# Altium PCB Placa1.PcbDoc
Units mm, origin at the board's own origin, x right, y up, seen from the top; angles counter-clockwise.
Board outline 64 x 64 mm, 2 copper layers (Top Layer, Bottom Layer); 5 components, 10 nets, 35 pads, 0 vias.
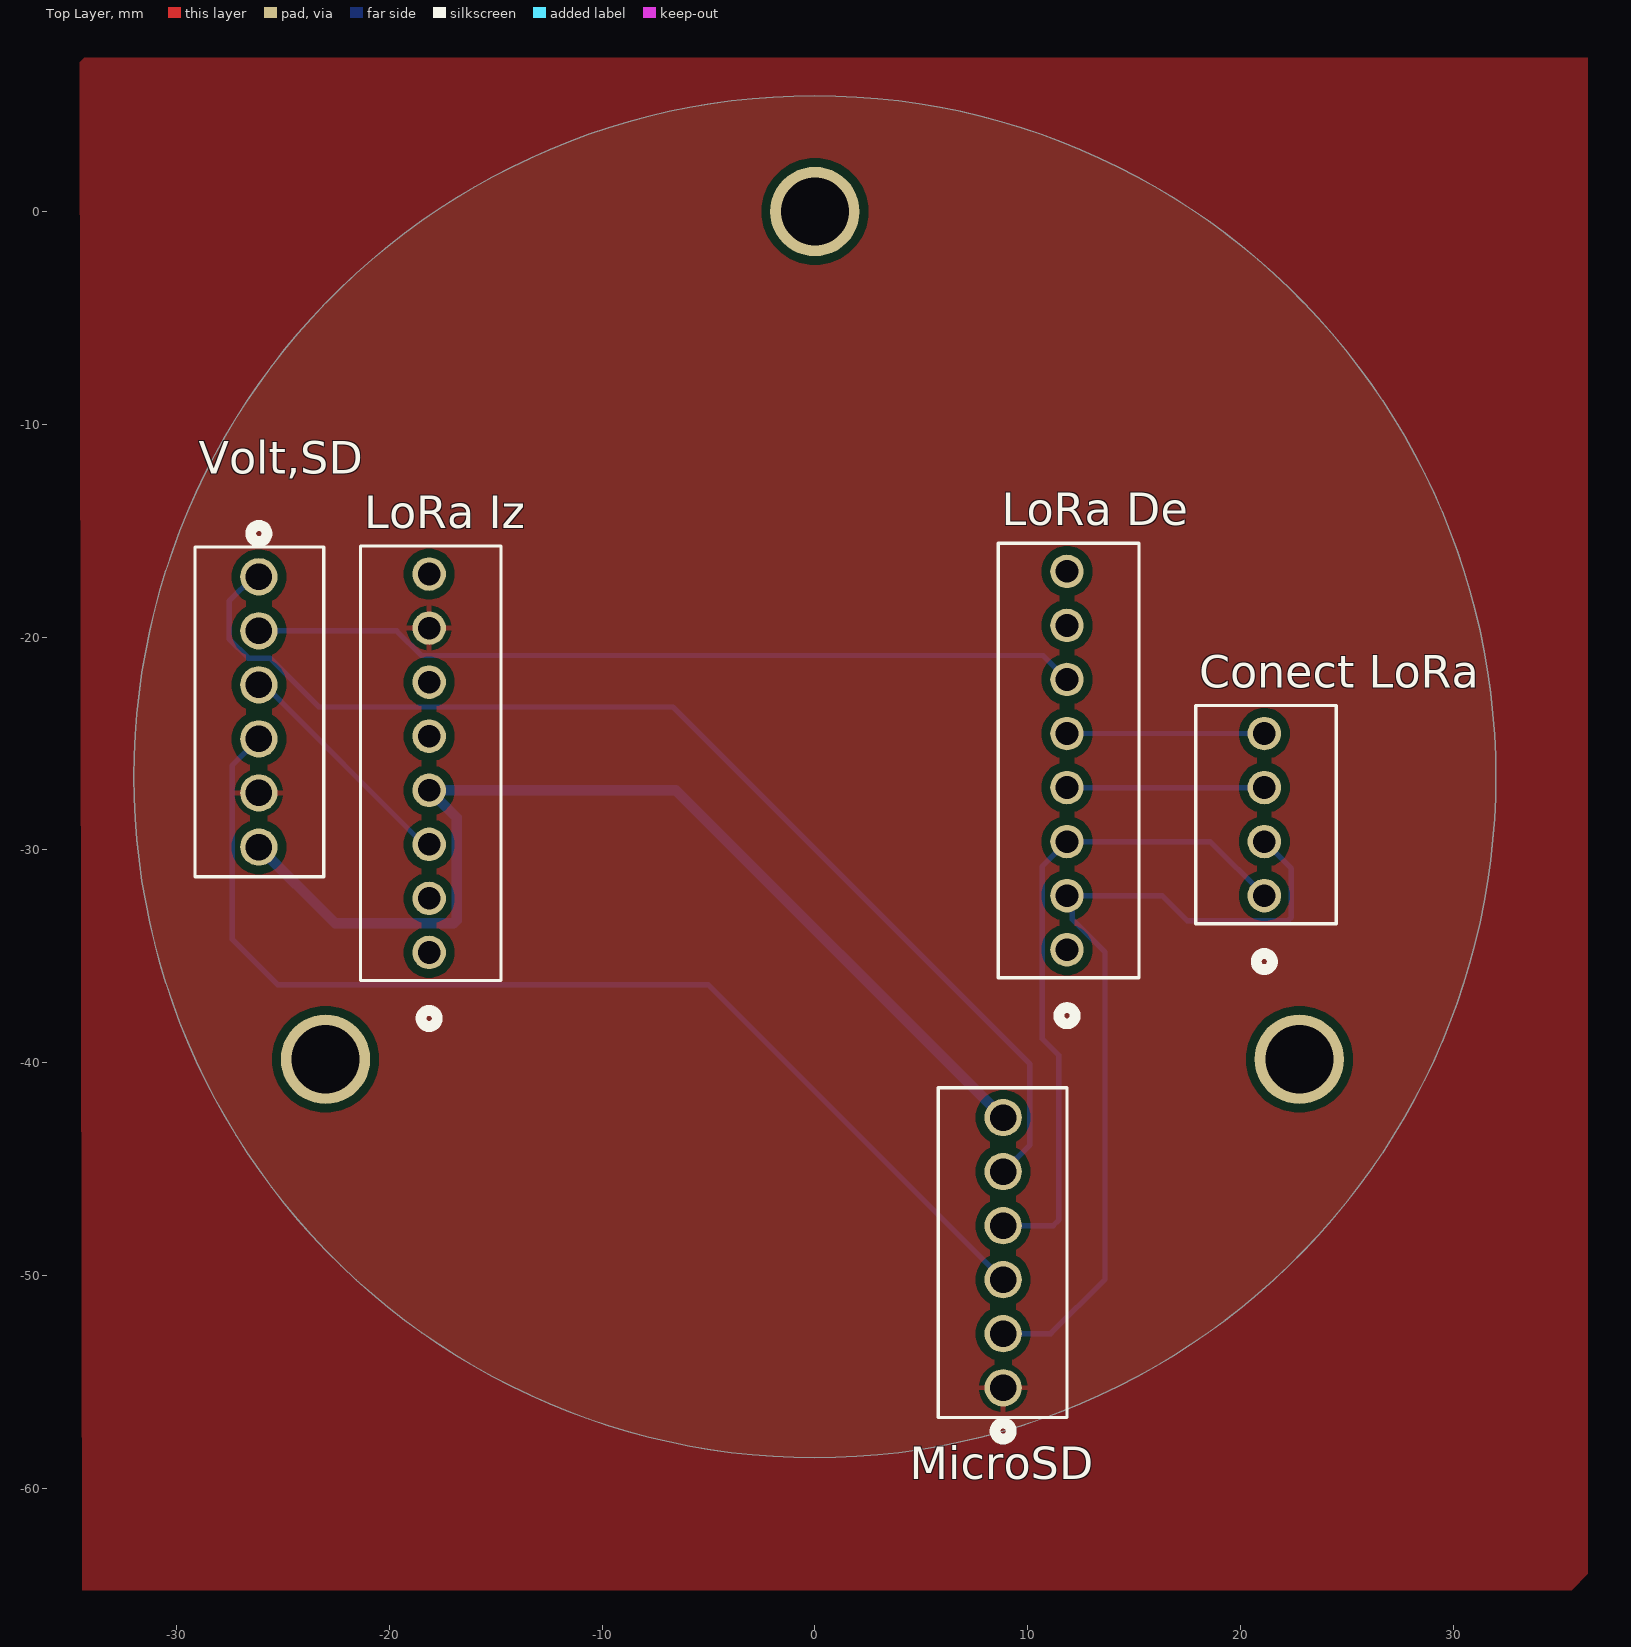
[diagram p0: Top Layer view]
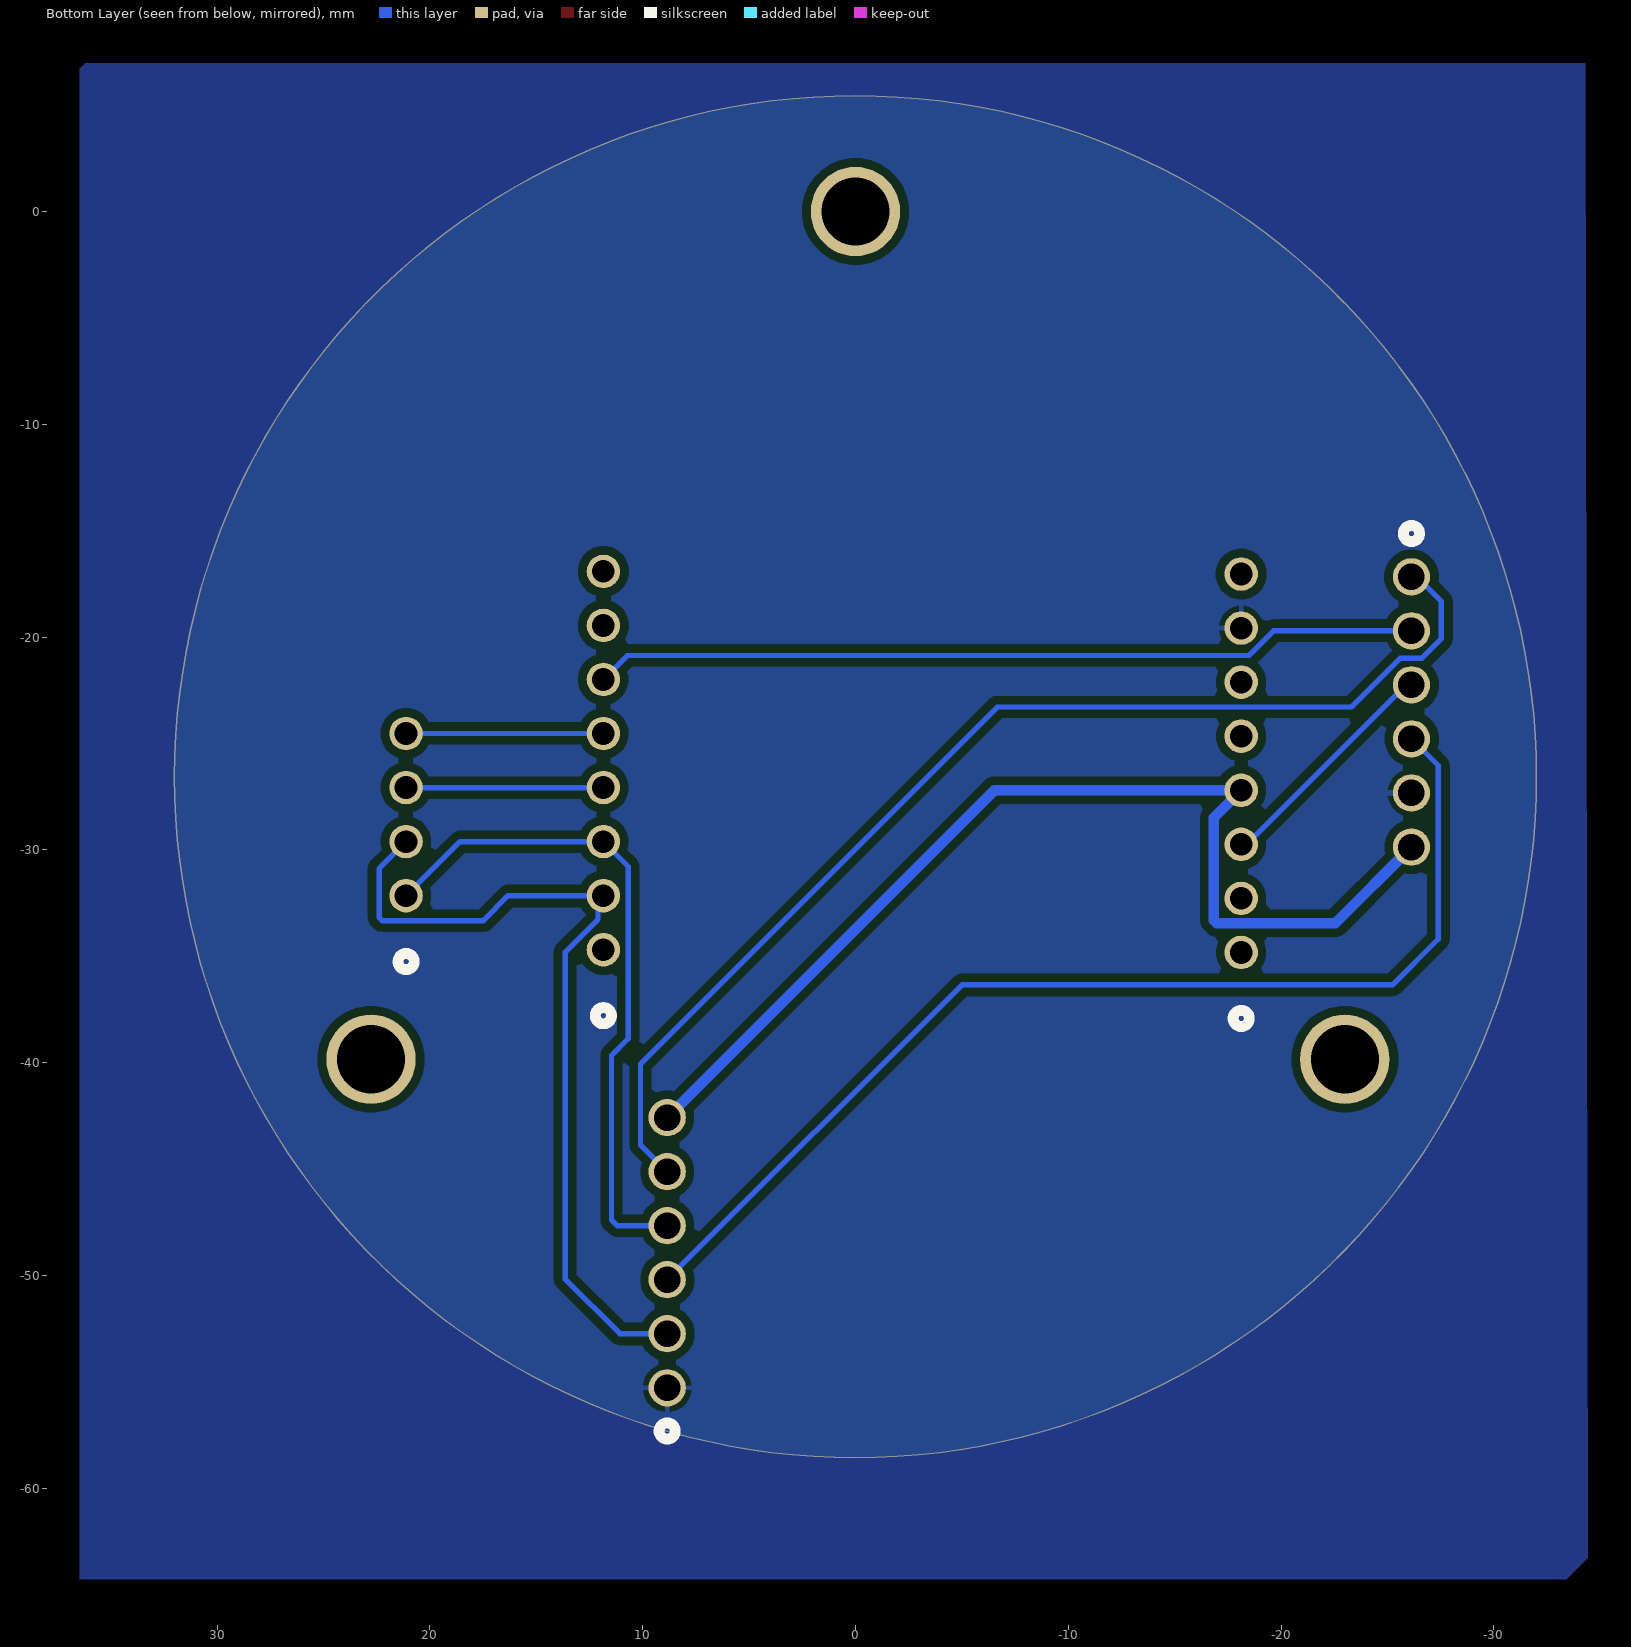
[diagram p1: Bottom Layer view, seen from below]

## Layer stack, top to bottom
Top Solder: solder mask 0.0102, Solder Resist, Dk 3.5
Top Layer: signal copper 0.0356
Dielectric 1: dielectric 0.32, FR-4, Dk 4.8
Bottom Layer: signal copper 0.0356
Bottom Solder: solder mask 0.0102, Solder Resist, Dk 3.5

## Board outline
-32,-26.558 ccw(c0,-26.558) 0,-58.558 ccw(c0,-26.558) 32,-26.558 ccw(c0,-26.558) 0,5.442 ccw(c0,-26.558)

## Design rules (kind name [scope] priority, off if disabled: settings)
Clearance [All] p1: gap=0.1 ignorepadtopadclearanceinfootprint=FALSE
HoleSize [All] p1: absolutevalues=TRUE maxlimit=6 minlimit=0.025 maxpercent=80.000 minpercent=20.000
PolygonConnect [All] p1: connectstyle=Relief reliefconductorwidth=0.254 reliefentries=4 polygonreliefangle="90 Angle" airgapwidth=0.254
RoutingVias [All] p1: holewidth=0.711 width=1.27 viastyle="Through Hole" minholewidth=0.711 minwidth=1.27 maxholewidth=0.711 maxwidth=1.27
SolderMaskExpansion [All] p1: expansion=0 istentingtop=FALSE
Width [All] p1: maxlimit=0.5 minlimit=0.254 preferedwidth=0.254
29 further rules are at their usual default settings.

## Components (designator, comment, footprint, x,y, rotation, side; value= is the part's Value field where it differs from the comment)
"Conect LoRa" "22112042" CONN_A-6373-04A_MOL 21.116,-32.149 r90 top
"LoRa De" "22112082" CONN_A-6373-08A_MOL 11.845,-34.689 r90 top
"LoRa Iz" "22112082" CONN_A-6373-08A_MOL -18.127,-34.816 r90 top
MicroSD "22272061" CONN_AE-6410-06A_MOL 8.845,-55.273 r270 top
Volt,SD "22272061" CONN_AE-6410-06A_MOL -26.128,-17.163 r90 top

## Footprints (in the part's own frame and the unit in brackets; to place one, negate y for a bottom-side part, rotate by r counter-clockwise, add the part's x,y. Pads: shape width x height; smd on the part's side, far side on the other; paste and mask are expansions set on the pad)
CONN_A-6373-04A_MOL [mil]
  round 62 hole 42: 1(0,0) 2(100,0) 3(200,0) 4(300,0)
  silkscreen extent -137,-133 352,127
CONN_A-6373-08A_MOL [mil]
  round 62 hole 42: 1(0,0) 2(100,0) 3(200,0) 4(300,0) 5(400,0) 6(500,0) 7(600,0) 8(700,0)
  silkscreen extent -137,-133 752,127
CONN_AE-6410-06A_MOL [mil]
  round 69 hole 49: 1(0,0) 2(-100,0) 3(-200,0) 4(-300,0) 5(-400,0) 6(-500,0)
  silkscreen extent -555,-120 95,118

## Part data
"Conect LoRa" MicroSD Volt,SD: Package=None, Availability=Unavailable, Price=None
  "Conect LoRa": MP=22112042
  MicroSD Volt,SD: MP=22272061
"LoRa De" "LoRa Iz": "KKÂ® 254 Solid Header, Vertical, with Friction Lock, 8 Circuits, Gold (Au) Plating", Package=None, Check_prices=https://www.snapeda.com/parts/22-11-2082/Molex/view-part/?ref=eda, MF=Molex, MP=22-11-2082, SnapEDA_Link=https://www.snapeda.com/parts/22-11-2082/Molex/view-part/?ref=snap

## Free pads (board coordinates)
  round 4.2 hole 3.2: ""(-22.997,-39.837) ""(0,0) ""(22.765,-39.837)

## Nets (pads, with @x,y where several pads share a name; then routed paths per layer and width w, separated by ;. In a path a pad name is that pad's centre, name@x,y a point inside that pad or via, vN(x,y) a via of type N, cw(c..) or ccw(c..) an arc to the next point about the centre after c; other vN are vias at no path point)
3.3V: "LoRa Iz.4" MicroSD.6 Volt,SD.6 | length 50.8
  Bottom Layer w0.254: -16.984,-33.444 -16.835,-33.296
  Bottom Layer w0.5: -26.128,-29.863 -22.547,-33.444 -16.984,-33.444 ; -16.835,-33.296 -16.835,-28.488 -18.127,-27.196 -6.532,-27.196 MicroSD.6
"CLK MicroSD": MicroSD.3 Volt,SD.4 | length 52.8
  Bottom Layer w0.254: -26.128,-24.783 -27.385,-26.04 -27.385,-34.194 -25.239,-36.34 -5.008,-36.34 MicroSD.3
"CS MicoSD": MicroSD.5 Volt,SD.1 | length 55.1
  Bottom Layer w0.254: -26.128,-17.163 -26.382,-17.163 -27.525,-18.306 -27.525,-20.084 -26.623,-20.986 -25.607,-20.986 -23.309,-23.284 -6.672,-23.284 10.102,-40.058 10.102,-43.856 MicroSD.5
"DIO0 LoRa": "LoRa Iz.3" Volt,SD.3 | length 11.1
  Bottom Layer w0.254: -26.128,-22.243 -25.874,-22.243 -18.381,-29.736 -18.127,-29.736
GND: "LoRa Iz.7" MicroSD.1 Volt,SD.5
"MISO SPI": "Conect LoRa.2" "LoRa De.2" MicroSD.2 | length 39.8
  Bottom Layer w0.254: MicroSD.2 11.073,-52.733 13.629,-50.177 13.629,-34.799 12.098,-33.267 12.098,-32.402 11.845,-32.149 16.317,-32.149 17.485,-33.317 22.237,-33.317 22.386,-33.169 22.386,-30.879 21.116,-29.609
"MOSI SPI": "Conect LoRa.1" "LoRa De.3" MicroSD.4 | length 31.6
  Bottom Layer w0.254: MicroSD.4 11.2,-47.653 11.464,-47.389 11.464,-39.656 10.677,-38.868 10.677,-30.777 11.845,-29.609 18.576,-29.609 21.116,-32.149
"NSS LoRa": "Conect LoRa.4" "LoRa De.5" | length 9.3
  Bottom Layer w0.254: 11.845,-24.529 21.116,-24.529
"RST LoRa": "LoRa De.6" Volt,SD.2 | length 38.9
  Bottom Layer w0.254: -26.128,-19.703 -19.652,-19.703 -18.492,-20.863 10.719,-20.863 11.845,-21.989
"SCK SPI": "Conect LoRa.3" "LoRa De.4" | length 9.3
  Bottom Layer w0.254: 11.845,-27.069 21.116,-27.069
pads on no net: "LoRa De.1" "LoRa De.7" "LoRa De.8" "LoRa Iz.1" "LoRa Iz.2" "LoRa Iz.5" "LoRa Iz.6" "LoRa Iz.8"

## Polygon pours and split planes (outlines as drawn)
GND on Top Layer "NONET_L01_P-001" (solid, pour order 0): -34.544,7.097 -34.417,7.224 36.322,7.224 36.322,-64.023 35.56,-64.785 -34.417,-64.785
GND on Bottom Layer "NONET_L01_P-001" (solid, pour order 1): -34.29,6.97 36.195,6.97 36.449,6.716 36.449,-64.277 -33.401,-64.277 -34.417,-63.261

## Silkscreen, mask and mechanical layers (free items; w line width, h text height)
Mechanical 1:
  circle w0.254: c0,-26.558 r32